# Altium PCB nimother.PcbDoc
Units mil, origin at the board's own origin, x right, y up, seen from the top; angles counter-clockwise.
Board outline 5298 x 3149 mil, 3 copper layers (Top Layer, Mid-Layer 24, Bottom Layer); 106 components, 79 nets, 394 pads, 0 vias.
Unrouted connection lines stored in the file: 128.
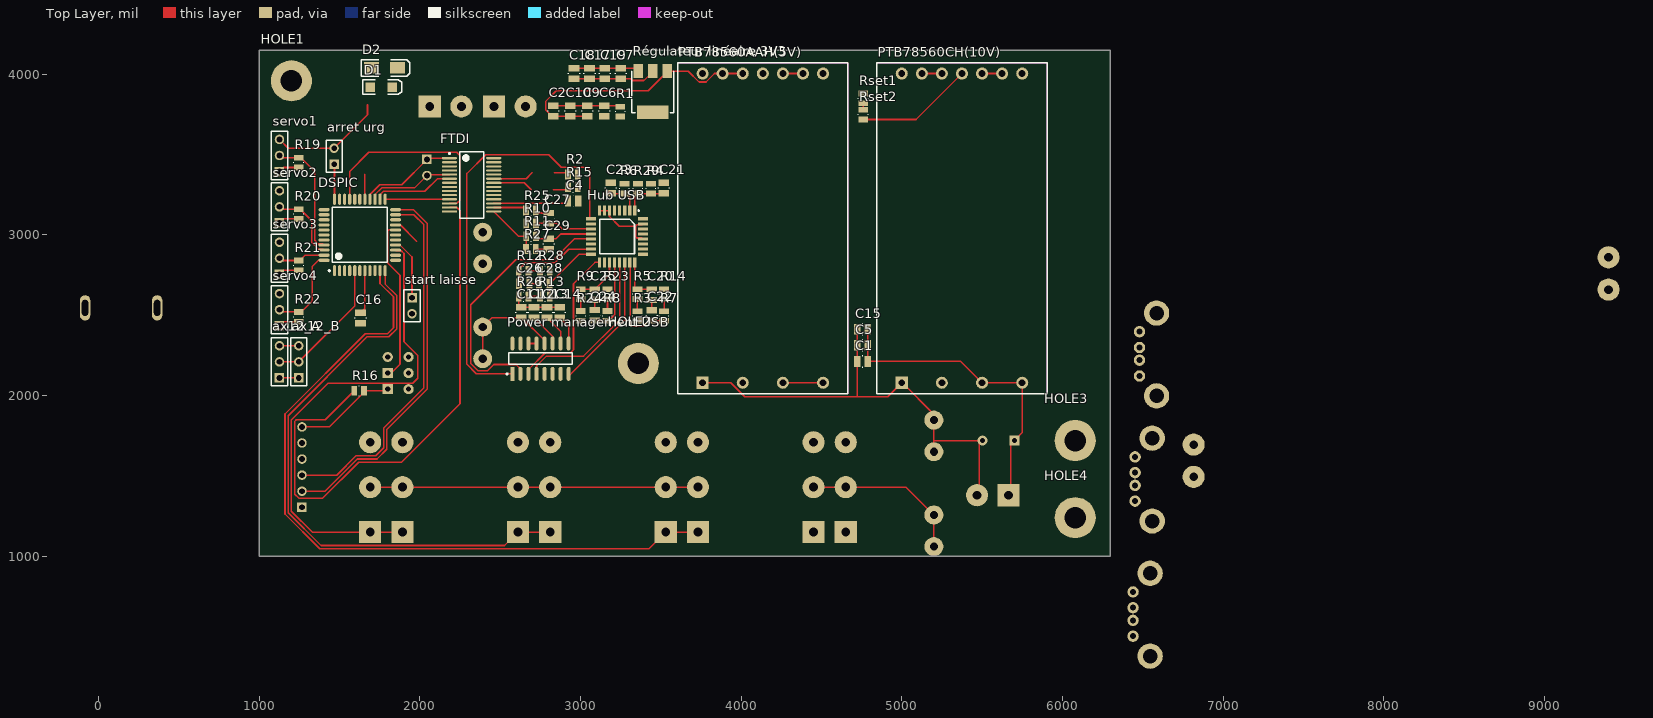
[diagram p0: Top Layer view]
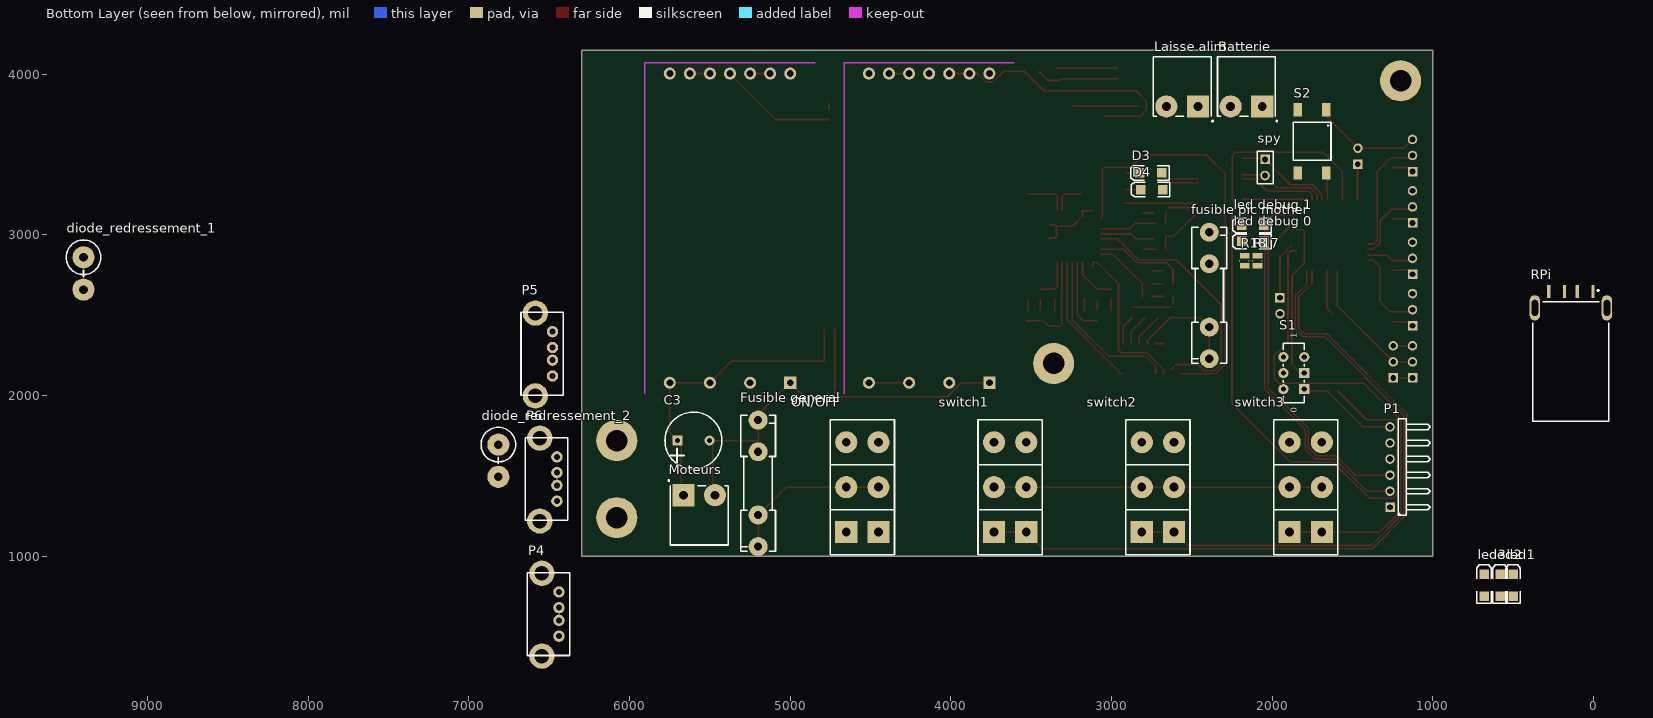
[diagram p1: Bottom Layer view, seen from below]
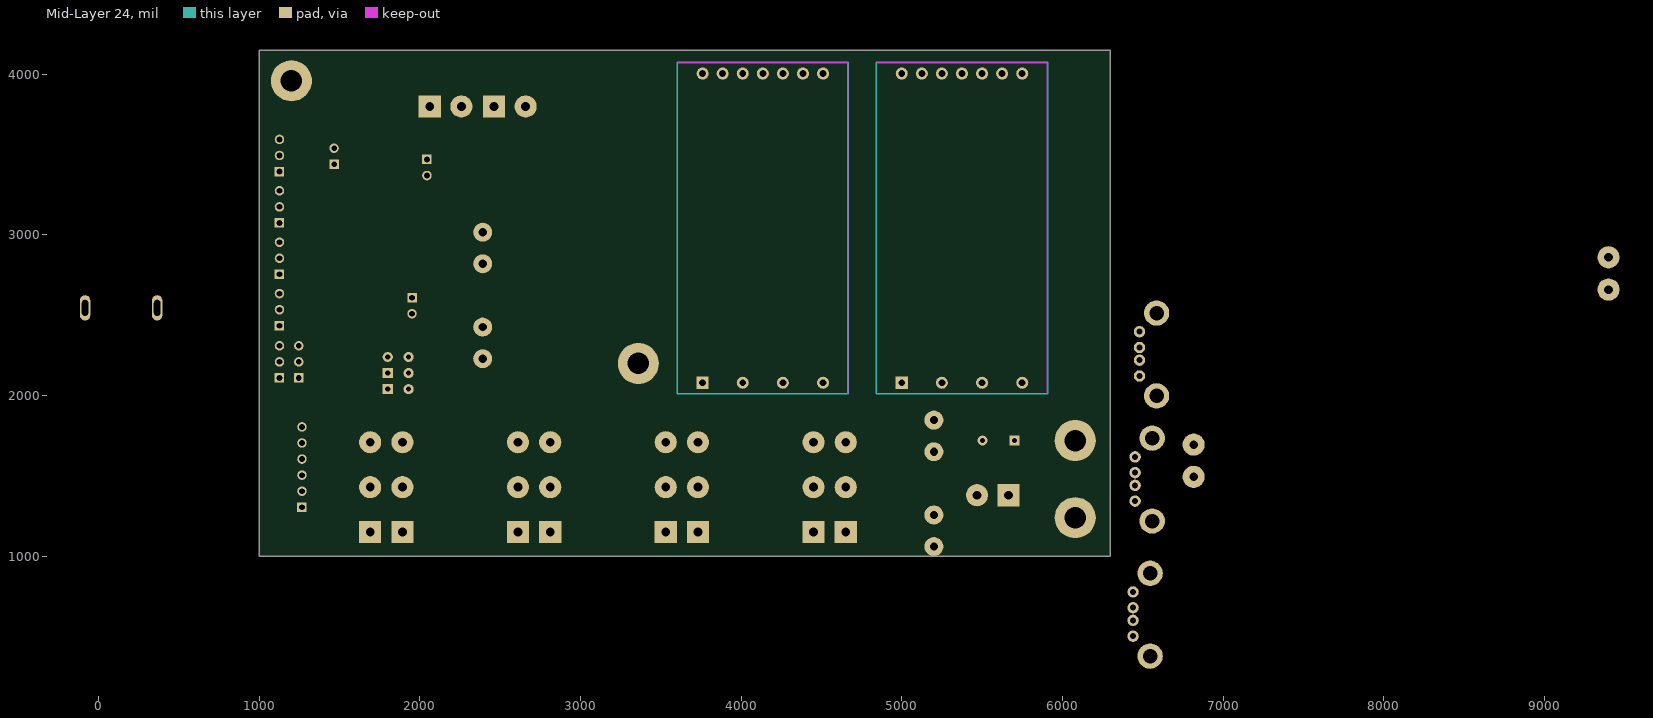
[diagram p2: Mid-Layer 24]

## Layer stack, top to bottom
Top Layer: signal copper 1.4
Dielectric: dielectric 12.6, FR-4, Dk 4.8
Mid-Layer 24: signal copper 1.4
Dielectric: dielectric 12.6, FR-4, Dk 4.8
Bottom Layer: signal copper 1.4

## Board outline
1000,1000 1000,4149 6298,4149 6298,1000

## Design rules (kind name [scope] priority, off if disabled: settings)
Clearance [All] p1: gap=10
PolygonConnect [All] p1: connectstyle=Relief reliefconductorwidth=10 reliefentries=4 polygonreliefangle="90 Angle"
RoutingVias [All] p1: holewidth=28 width=50 viastyle="Through Hole" minholewidth=28 minwidth=50 maxholewidth=28 maxwidth=50
SilkscreenOverComponentPads [All] p1: minsilkscreentomaskgap=10
SolderMaskExpansion [All] p1: expansion=4
Width [All] p1: maxlimit=10 minlimit=10 preferedwidth=10
27 further rules are at their usual default settings.

## Classes and differential pairs
component class U_mother1-pic: "arret urg" ax12_A ax12_B C4 C11 C16 C17 C18 C19 D2 D3 D4 DSPIC FTDI "fusible pic mother" led1 led2 led3 "led debug 0" "led debug 1" P1 R2 R15 R16 R17 R18 R19 R20 R21 R22 S2 servo1 servo2 servo3 servo4 spy "start laisse" switch1 switch2 switch3
component class mother1: Batterie C1 C2 C3 C5 C6 C7 C9 C10 C12 C13 C14 C15 C20 C21 C22 C23 C24 C25 C26 C27 C28 C29 D1 diode_redressement_1 diode_redressement_2 "Fusible general" HOLE1 HOLE2 HOLE3 HOLE4 "Hub USB" "Laisse alim" Moteurs ON/OFF P4 P5 P6 "Power management USB" PTB78560AAH(5V) PTB78560CH(10V) R1 R3 R4 R5 R6 R7 R8 R9 R10 R11 R12 R13 R14 R23 R24 R25 R26 R27 R28 R29 RPi Rset1 Rset2 "Régulateur linéaire 3V3" S1

## Components (designator, comment, footprint, x,y, rotation, side; value= is the part's Value field where it differs from the comment)
"arret urg" "Header 2" HDR1X2 1466,3440 r90 top
ax12_A "Header 3" HDR1X3 1126,2110 r90 top
ax12_B "Header 3" HDR1X3 1246,2110 r90 top
Batterie "Bornier" "Bornier male coude 2 voies" 2160,3800 r0 bottom
C1 "CAP" C0805C 4788,2213 r180 top
C2 "CAP" C0805C 2831,3740 r90 top
C3 "CAP POL" RB.2/.4 5702.75,1720 r0 bottom
C4 "CAP" C0805C 2922,3212 r0 top
C5 "CAP" C0805C 4788,2313 r180 top
C6 "CAP" C0805C 3147.07,3740 r90 top
C7 "CAP" C0805C 3251,3973 r90 top
C9 "CAP" C0805C 3041.71,3740 r90 top
C10 "CAP" C0805C 2936.36,3740 r90 top
C11 "CAP" C0805C 2631,2550 r270 top
C12 "CAP" C0805C 2711,2550 r270 top
C13 "CAP" C0805C 2791,2550 r270 top
C14 "CAP" C0805C 2871,2550 r270 top
C15 "CAP" C0805C 4788,2413 r180 top
C16 "CAP" C0805C 1631,2450 r90 top
C17 "CAP" C0805C 3056,3973 r90 top
C18 "CAP" C0805C 2960,3973 r90 top
C19 "CAP" C0805C 3151,3973 r90 top
C20 "CAP" C0805C 3443,2660.03 r270 top
C21 "CAP" C0805C 3518,3259.87 r90 top
C22 "CAP" C0805C 3443,2467.04 r90 top
C23 "CAP" C0805C 3188,3259.87 r90 top
C24 "CAP" C0805C 3089.43,2533.02 r270 top
C25 "CAP" C0805C 3089.43,2596.09 r90 top
C26 "CAP" C0805C 2682,2697 r180 top
C27 "CAP" C0805C 2802,3072 r90 top
C28 "CAP" C0805C 2742,2697 r0 top
C29 "CAP" C0805C 2802,2912 r90 top
D1 "LED2" LED1206G 1760,3920 r0 top
D2 "5.6V" DSO-C2/X1.8 1780,4040 r0 top
D3 "LED" LED1206Y 2755.19,3387 r0 bottom
D4 "LED" LED1206Y 2750.19,3282 r0 bottom
diode_redressement_1 "Diode" "Axial1.3 Vert" 9400,2860.98 r270 bottom
diode_redressement_2 "Diode" "Axial1.3 Vert" 6817,1694.98 r270 bottom
DSPIC "DSPIC33FJ64MC804-I/PT" TQFP-PT44_N 1626,3000 r90 top
FTDI "FT232RL" SSOP-28_M 2322,3312 r0 top
"Fusible general" "Fuse" "Fuse Holder 5x20mm" 5200,1847.4 r270 bottom
"fusible pic mother" "Fuse" "Fuse Holder 5x20mm" 2391,3017.4 r270 bottom
HOLE1 "Hole" SCREW 1200,3960 r0 top
HOLE2 "Hole" SCREW 3360,2200 r0 top
HOLE3 "Hole" SCREW 6080,1720 r90 top
HOLE4 "Hole" SCREW 6080,1240 r90 top
"Hub USB" "TUSB2046BVF" TUSB2046BVF 3338,3152 r270 top
"Laisse alim" "Bornier" "Bornier male coude 2 voies" 2560,3800 r0 bottom
led1 "LED" LED1206G 500,820 r90 bottom
led2 "LED" LED1206G 580,820 r90 bottom
led3 "LED" LED1206G 680,820 r90 bottom
"led debug 0" "LED" LED1206R 2120,2960 r0 bottom
"led debug 1" "LED" LED1206R 2120,3060 r0 bottom
Moteurs "Bornier" "Bornier male coude 2 voies" 5567.01,1380 r180 bottom
ON/OFF "Switch slide 2 pos" "Switch sur cosses 5.08mm" 4551,1430 r180 bottom
P1 "PICkit" HDR1X6H 1266,1305 r90 bottom
P4 "USB" "USB SM female vertical" 6440,640 r270 bottom
P5 "USB" "USB SM female vertical" 6480,2260 r270 bottom
P6 "USB" "USB SM female vertical" 6453,1480.87 r270 bottom
"Power management USB" "TPS2044" TPS2044 2751,2230 r90 top
PTB78560AAH(5V) "PTB78560x" PTB78560x 3760,2080 r90 top
PTB78560CH(10V) "PTB78560x" PTB78560x 5000,2080 r90 top
R1 "RES" C0805R 3248,3799.06 r270 top
R2 "RES" C0805R 2922,3377 r0 top
R3 "RES" C0805R 3354.43,2465.07 r90 top
R4 "RES" C0805R 3438,3257.91 r90 top
R5 "RES" C0805R 3354.43,2662 r270 top
R6 "RES" C0805R 3273,3318.93 r270 top
R7 "RES" C0805R 3520.43,2465.07 r90 top
R8 "RES" C0805R 3168,2466.09 r90 top
R9 "RES" C0805R 3002,2663.02 r270 top
R10 "RES" C0805R 2662,3072 r0 top
R11 "RES" C0805R 2662,2992 r0 top
R12 "RES" C0805R 2676.09,2777 r180 top
R13 "RES" C0805R 2747.91,2617 r0 top
R14 "RES" C0805R 3520.43,2662 r270 top
R15 "RES" C0805R 2922,3297 r0 top
R16 "RES" C0805R 1591,2030 r0 top
R17 "RES" C0805R 2091,2808.98 r90 bottom
R18 "RES" C0805R 2171,2808.98 r90 bottom
R19 "RES" C0805R 1246,3420 r90 top
R20 "RES" C0805R 1246,3100 r90 top
R21 "RES" C0805R 1246,2780 r90 top
R22 "RES" C0805R 1246,2460 r90 top
R23 "RES" C0805R 3168,2602 r90 top
R24 "RES" C0805R 3002,2527.12 r270 top
R25 "RES" C0805R 2722,3152 r180 top
R26 "RES" C0805R 2615.07,2617 r0 top
R27 "RES" C0805R 2722,2912 r180 top
R28 "RES" C0805R 2808.93,2777 r180 top
R29 "RES" C0805R 3358,3318.93 r270 top
RPi "USB" "USB SM2.5 Male" 140,2440 r270 bottom
Rset1 "RES" C0805R 4760,3820 r90 top
Rset2 "RES" C0805R 4760,3780 r270 top
"Régulateur linéaire 3V3" "LM2937IMP-3.3" SOT223 3540,4020 r180 top
S1 "SW-DPDT/Reset" MCLSS22 1800,2140 r90 bottom
S2 "SPST-NO" SPST-NO 1662.83,3780 r0 bottom
servo1 "Header 3" HDR1X3 1126,3395 r90 top
servo2 "Header 3" HDR1X3 1126,3075 r90 top
servo3 "Header 3" HDR1X3 1126,2755 r90 top
servo4 "Header 3" HDR1X3 1126,2435 r90 top
spy "Header 2" HDR1X2 2044,3470 r270 bottom
"start laisse" "Header 2" HDR1X2 1951,2610 r270 top
switch1 "Switch slide 2 pos" "Switch sur cosses 5.08mm" 3631,1430 r180 bottom
switch2 "Switch slide 2 pos" "Switch sur cosses 5.08mm" 2711,1430 r180 bottom
switch3 "Switch slide 2 pos" "Switch sur cosses 5.08mm" 1791,1430 r180 bottom

## Footprints (in the part's own frame and the unit in brackets; to place one, negate y for a bottom-side part, rotate by r counter-clockwise, add the part's x,y. Pads: shape width x height; smd on the part's side, far side on the other; paste and mask are expansions set on the pad)
"Axial1.3 Vert" [mm] "Vertical Axial Lead ; Diode : DO-201AD ; 5mm radius, 1.25mm leads"
  round 3.5 hole 1.35: 1(0,0) 2(5.1,0)
  silkscreen extent -2.74,-2.74 3.05,2.74, body extent -2.8,-2.8 5.74,2.8, height 15.69
"Bornier male coude 2 voies" [mm] "Bornier male coude 2 voies 12A. Pas 5mm (model : CTB9350/2A) -- 3D FAUSSE"
  rect 3.5x3.5 hole 1.4: 1(-2.5,0)
  round 3.5 hole 1.4: 2(2.5,0)
  silkscreen extent -4.9,-7.87 4.57,2.41, body extent -4.2,-7.93 4.2,1.27, height 7.25
C0805C [mm]
  rect 1x1.7 smd: 1(0,0) 2(1.65,0)
  silkscreen extent 0.8,-0.89 0.85,0.89, body extent -0.21,-0.61 1.79,0.64, height 0.78
C0805R [mm]
  rect 0.9x1.55 smd: 1(0,0) 2(1.55,0)
  silkscreen extent 0.73,-0.76 0.81,0.76, body extent -0.24,-0.62 1.76,0.63, height 0.78
DSO-C2/X1.8 [mm] "Diode; DO-214-AC/SMA; 2 C-Bend Leads; Body 5 x 2.7 mm, inc. leads (LxW)"
  rect 2.4x1.8 smd: A(2.05,0) K(-2.05,0)
  silkscreen extent -3.65,-1.3 3.95,1.3, body extent -2.74,-1.4 2.74,1.4, height 2.28
"Fuse Holder 5x20mm" [mm] "Schurter Fuse Holder 0751.0110"
  round 3 hole 1.3: 1(0,0) 1(5,0) 2(15,0) 2(20,0)
  silkscreen extent -0.75,-2.75 20.75,2.75, body extent -0.51,-3.1 20.58,3.1, height 9.86
HDR1X2 [mm] "Connector; Header; 2 Position"
  rect 1.5x1.5 hole 0.9: 1(0,0)
  round 1.5 hole 0.9: 2(2.54,0)
  silkscreen extent -1.27,-1.27 3.81,1.27
HDR1X3 [mm] "Connector; Header; 3 Position"
  rect 1.5x1.5 hole 0.9: 1(0,0)
  round 1.5 hole 0.9: 2(2.54,0) 3(5.08,0)
  silkscreen extent -1.27,-1.27 6.35,1.27
HDR1X6H [mm] "Connector; Header; 6 Position; Right Angle"
  rect 1.5x1.5 hole 0.9: 1(0,0)
  round 1.5 hole 0.9: 2(2.54,0) 3(5.08,0) 4(7.62,0) 5(10.16,0) 6(12.7,0)
  silkscreen extent -1.27,-6.35 13.97,-1.27, body extent -1.17,-5.85 13.87,1.25, height 5.42
LED1206G [mm] "SMT LED; 2 Flat Leads; 3.2X1.6X1.1"
  rect 1.5x1.5 smd: 1(-1.75,0) 2(1.75,0)
  silkscreen extent -2.9,-1.15 3.2,1.15, body extent -1.6,-0.8 1.6,0.8, height 1.11
LED1206R [mm] "SMT LED; 2 Flat Leads; 3.2X1.6X1.1"
  rect 1.5x1.5 smd: 1(-1.75,0) 2(1.75,0)
  silkscreen extent -2.9,-1.15 3.2,1.15, body extent -1.6,-0.8 1.6,0.8, height 1.11
LED1206Y [mm] "SMT LED; 2 Flat Leads; 3.2X1.6X1.1"
  rect 1.5x1.5 smd: 1(-1.75,0) 2(1.75,0)
  silkscreen extent -2.9,-1.15 3.2,1.15, body extent -1.6,-0.8 1.6,0.8, height 1.11
MCLSS22 [mm] "Slide Switch DPDT"
  rect 1.6x1.6 hole 0.8: 1(0,0) 2(-2.54,0)
  round 1.6 hole 0.8: 3(2.54,0) 4(0,3.3) 5(-2.54,3.3) 6(2.54,3.3)
  silkscreen extent -4.7,0 4.7,3.3, body extent -4.7,-2 4.7,3.3, height 3.5
PTB78560x [mm] "PTB78560x Texas Instruments Regulator"
  rect 1.905x1.905 hole 1.1: 1(0,0)
  round 1.905 hole 1.1: 2(0,-6.35) 3(0,-12.7) 4(0,-19.05) 5(48.895,-19.05) 6(48.895,-15.875) 7(48.895,-12.7) 8(48.895,-9.525) 9(48.895,-6.35) 10(48.895,-3.175) 11(48.895,0)
  Mid-Layer 24 lines w0.2: -1.778,4 50.673,4.001 50.673,-23.05 -1.778,-23.05 -1.778,4
  Keep-Out Layer lines w0.2: 50.609,3.937 50.609,-22.987 -1.714,-22.987
  silkscreen extent -1.71,-22.99 50.61,3.94, body extent -1.71,-22.99 50.61,3.94, height 10
RB.2/.4 [mil]
  rect 62x62 hole 31.5: 1(0,0)
  round 62 hole 31.5: 2(-200,0)
  silkscreen extent -277,-177 77,177, body extent -298,-194 95,200, height 650
SCREW [mm] "Mounting Hole M3"
  round 6.5 hole 3.4: 1(0,0)
  body extent -2.89,-2.52 2.89,2.52, height 10
SOT223 [mm]
  rect 1.5x2.2 smd: 1(0,0) 2(2.3,0) 3(4.6,0)
  rect 5x2.2 smd: ""(2.3,6.5)
  silkscreen extent -1,0 5.6,6.6, body extent -0.95,-0.2 5.55,6.8, height 1.64
SPST-NO [mm] "Tactile Switch SPST-NO 6x6mm"
  rect 1.4x2.1 smd: 1(0,0) 2(4.5,0) 3(4.5,10) 4(0,10)
  silkscreen extent -0.75,2 5.25,8, body extent -0.75,0.93 5.25,9.08, height 5
SSOP-28_M [mm] "SOP, 28-Leads, Body 10.2x5.3mm, Pitch 0.65mm, IPC Low Density"
  oval 2.4x0.35 smd: 1(-3.5,4.225) 2(-3.5,3.575) 3(-3.5,2.925) 4(-3.5,2.275) 5(-3.5,1.625) 6(-3.5,0.975) 7(-3.5,0.325) 8(-3.5,-0.325) 9(-3.5,-0.975) 10(-3.5,-1.625) 11(-3.5,-2.275) 12(-3.5,-2.925) 13(-3.5,-3.575) 14(-3.5,-4.225) 15(3.5,-4.225) 16(3.5,-3.575) 17(3.5,-2.925) 18(3.5,-2.275) 19(3.5,-1.625) 20(3.5,-0.975) 21(3.5,-0.325) 22(3.5,0.325) 23(3.5,0.975) 24(3.5,1.625) 25(3.5,2.275) 26(3.5,2.925) 27(3.5,3.575) 28(3.5,4.225)
  silkscreen extent -3.62,-5.25 1.9,5.25, body extent -3.91,-5.1 3.91,5.1, height 1.98
"Switch sur cosses 5.08mm" [mm] "Crimp Faston CI 5.08mm model : AMP - 1217080-1"
  rect 3.5x3.5 hole 1.4: 1(-2.55,-7.1) 1(2.55,-7.1)
  round 3.5 hole 1.4: 2(-2.55,7.1) 2(2.55,7.1) 3(-2.55,0) 3(2.55,0)
  silkscreen extent -5.08,-10.67 5.08,10.67, body extent -11.5,-11 11.5,12, height 29.34
TPS2044 [mm] "Power distribution USB"
  rect 2.2x0.6 smd: 1(-2.4,4.445)
  oval 2.2x0.6 smd: 2(-2.4,3.175) 3(-2.4,1.905) 4(-2.4,0.635) 5(-2.4,-0.635) 6(-2.4,-1.905) 7(-2.4,-3.175) 8(-2.4,-4.445) 9(2.4,-4.445) 10(2.4,-3.175) 11(2.4,-1.905) 12(2.4,-0.635) 13(2.4,0.635) 14(2.4,1.905) 15(2.4,3.175) 16(2.4,4.445)
  silkscreen extent -2.52,-5 0.9,5.42, body extent -3,-5.1 3,5.1, height 1.7
TQFP-PT44_N [mm] "Thin QFP, 44-Leads, Body 10x10mm, Pitch 0.8mm, IPC Medium Density"
  oval 1.75x0.5 smd: 1(-5.65,4) 2(-5.65,3.2) 3(-5.65,2.4) 4(-5.65,1.6) 5(-5.65,0.8) 6(-5.65,0) 7(-5.65,-0.8) 8(-5.65,-1.6) 9(-5.65,-2.4) 10(-5.65,-3.2) 11(-5.65,-4) 23(5.65,-4) 24(5.65,-3.2) 25(5.65,-2.4) 26(5.65,-1.6) 27(5.65,-0.8) 28(5.65,0) 29(5.65,0.8) 30(5.65,1.6) 31(5.65,2.4) 32(5.65,3.2) 33(5.65,4)
  oval 0.5x1.75 smd: 12(-4,-5.65) 13(-3.2,-5.65) 14(-2.4,-5.65) 15(-1.6,-5.65) 16(-0.8,-5.65) 17(0,-5.65) 18(0.8,-5.65) 19(1.6,-5.65) 20(2.4,-5.65) 21(3.2,-5.65) 22(4,-5.65) 34(4,5.65) 35(3.2,5.65) 36(2.4,5.65) 37(1.6,5.65) 38(0.8,5.65) 39(0,5.65) 40(-0.8,5.65) 41(-1.6,5.65) 42(-2.4,5.65) 43(-3.2,5.65) 44(-4,5.65)
  silkscreen extent -5.77,-4.35 4.35,4.95, body extent -6,-6 6,6, height 1.05
TUSB2046BVF [mil] "TI 4-Port USB Hub"
  rect 63x19.7 smd: 1(0,0) 2(0,-31.5) 3(0,-63) 4(0,-94.5) 5(0,-125.9) 6(0,-157.4) 7(0,-188.9) 8(0,-220.4) 17(322.8,-220.4) 18(322.8,-188.9) 19(322.8,-157.4) 20(322.8,-125.9) 21(322.8,-94.5) 22(322.8,-63) 23(322.8,-31.5) 24(322.8,0)
  rect 19.7x63 smd: 9(51.2,-271.6) 10(82.7,-271.6) 11(114.2,-271.6) 12(145.7,-271.6) 13(177.1,-271.6) 14(208.6,-271.6) 15(240.1,-271.6) 16(271.6,-271.6) 25(271.6,51.2) 26(240.1,51.2) 27(208.6,51.2) 28(177.1,51.2) 29(145.7,51.2) 30(114.2,51.2) 31(82.7,51.2) 32(51.2,51.2)
  silkscreen extent -4,-218 270,28, body extent -16,-287 339,67, height 59
"USB SM2.5 Male" [mm] "USB/SM2.5-4H4; Male USB Connector; USB1.1, Type A, SM; 4 Position; Right Angle"
  rect 2.1x0.5 smd: 1(-5.3,3.5) 2(-5.3,1) 3(-5.3,-1) 4(-5.3,-3.5)
  oval 4x1.65 hole 1 slot 2.5 at 0 deg: 5(-2.7,-5.7) 6(-2.7,5.7)
  round 0.8 hole 1.1 unplated: MH1(-2.7,-2.25) MH2(-2.7,2.25)
  silkscreen extent -5.58,-6 15.2,6, body extent -3.5,-6 14.83,6, height 4.5
"USB SM female vertical" [mm] "USB SM female vertical"
  round 1.8 hole 0.95: 1(-3.5,0) 2(-1,0) 3(1,0) 4(3.5,0)
  round 4 hole 2.3: 5(6.65,-2.7) 6(-6.45,-2.7)
  silkscreen extent -6.55,-4.99 6.55,1.7, body extent -7.99,-4.99 7.99,2.65, height 13.75

## Part data
"arret urg" spy "start laisse": "Header, 2-Pin"
ax12_A ax12_B servo1 servo2 servo3 servo4: "Header, 3-Pin"
Batterie "Laisse alim" Moteurs: library part "Header 2", "Header, 2-Pin"
C1 C2 C4 C5 C6 C7 C9 C10 C11 C12 C13 C14 C15 C16 C17 C18 C19 C20 C21 C22 C23 C24 C25 C26 C27 C28 C29: "Capacitor"
C3: "Polarized Capacitor"
D1 led1 led2 led3: "Typical RED, GREEN, YELLOW, AMBER GaAs LED"
D2: library part ZENER, "Zener Diode"
D3 D4 "led debug 0" "led debug 1": library part LED2, "Typical RED, GREEN, YELLOW, AMBER GaAs LED"
diode_redressement_1 diode_redressement_2: "Default Diode"
DSPIC: "High-Performance 16-bit Digital Signal Controller, 64 KB Flash, 16 KB RAM, 44-Pin TQFP, Industrial Temperature"
FTDI: "USB UART Asynchronous Serial Data Transfer Chip, SSOP-28, Tube"
"Fusible general" "fusible pic mother": library part FUSE
HOLE1 HOLE2 HOLE3 HOLE4: "Mounting Hole for screws"
"Hub USB": "TI 4-Port USB Hub"
ON/OFF switch1 switch2 switch3: library part "Switch slide On/Off", "Switch slide 2 positions"
P1: library part "Header ICSP", "Header, 6-Pin, Right Angle"
P4 P5 P6 RPi: library part "USB Con", "USB Connector"
"Power management USB": "Power distribution USB"
PTB78560AAH(5V) PTB78560CH(10V): "Texas Instruments Regulators"
R1 R2 R3 R4 R5 R6 R7 R8 R9 R10 R11 R12 R13 R14 R15 R16 R17 R18 R19 R20 R21 R22 R23 R24 R25 R26 R27 R28 R29 Rset1 Rset2: "Resistor"
"Régulateur linéaire 3V3": "500 mA Low Dropout Regulator"
S1: library part SW-DPDT, "Double-Pole, Double-Throw Switch, ref MCLSS22"
S2: "Tactile Switch 7.3mm, SMD"

## Nets (pads, with @x,y where several pads share a name; then routed paths per layer and width w, separated by ;. In a path a pad name is that pad's centre, name@x,y a point inside that pad or via, vN(x,y) a via of type N, cw(c..) or ccw(c..) an arc to the next point about the centre after c; other vN are vias at no path point)
+3V3: "Hub USB.3" "Hub USB.4" "Hub USB.25" "Hub USB.26" "Régulateur linéaire 3V3.3" C7.2 C17.2 C18.2 C19.2 D1.1 DSPIC.17 DSPIC.28 DSPIC.40 FTDI.4 P1.2 R2.2 R4.2 R15.2 | length 380.9
  Top Layer w10: C18.2 C17.2 C19.2 C7.2 3340.94,4037.96
+5V0: "fusible pic mother.2" "Power management USB.15" "Power management USB.16" "Régulateur linéaire 3V3.1" C2.1 C9.1 C10.1 FTDI.20 PTB78560AAH(5V).9 PTB78560AAH(5V).10 R19.1 R20.1 R21.1 R22.1 servo1.1 servo2.1 servo3.1 servo4.1 | length 2064.7
  Top Layer w10: servo4.1@1151,2460 R22.1 ; servo3.1@1151,2780 R21.1 ; servo2.1@1151,3100 R20.1 ; servo1.1@1151,3420 R19.1 ; C9.1 C10.1 C2.1 2821.6,3740 2782.54,3779.06 2782.54,3830.86 2849.68,3898 3421.5,3898 3540,4016.5 3540,4020 3670.75,4020 3738.25,3952.5 3781.75,3952.5 3834.25,4005 3885,4005 4010,4005
+10V0: ax12_A.1 ax12_B.1 C6.1 PTB78560CH(10V).9 PTB78560CH(10V).10 | length 245
  Top Layer w10: ax12_A.1 ax12_B.1 ; 5125,4005 5250,4005
+30V: "Fusible general.2" C1.2 C3.1 C5.2 C15.2 Moteurs.1 PTB78560AAH(5V).1 PTB78560CH(10V).1 | length 2860.2
  Top Layer w10: 3760,2080 3935.75,2080 4022.19,1993.56 4913.56,1993.56 5000,2080 5004,2080 5200,1884 5200,1847.4 5200,1650.55 ; 4723.04,1997.6 C1.2 C5.2 C15.2 ; 5203,1720 5500,1720 ; 5481.57,1380 5481.57,1701.57
"ARRET URG": "arret urg.1" DSPIC.33 | length 215
  Top Layer w10: DSPIC.33 1468.52,3437.48
CLK12: DSPIC.30 FTDI.12 | length 1266.8
  Top Layer w10: DSPIC.30 1563.01,3395.58 1682.42,3515 2229,3515 2247,3497 2247,3213.92 2230.08,3197 FTDI.12@2184.36,3197
D+: FTDI.15 R11.1 R27.2 | length 344.8
  Top Layer w10: FTDI.15 2613.46,2992 R11.1 R27.2@2662,2913.02
D-: FTDI.16 R10.1 R25.2 | length 260.9
  Top Layer w10: FTDI.16 2641.72,3171.25 ; R10.1 R25.2@2662,3150.98
"DATA AX12": ax12_A.2 ax12_B.2 DSPIC.5 | length 831.9
  Top Layer w10: ax12_A.2 ax12_B.2 1594.5,2558.5 DSPIC.5
"DATA SERVO1": DSPIC.41 R19.2 servo1.2 | length 740
  Top Layer w10: servo1.2@1139.98,3481.02 R19.2 1259.98,3481.02 1346,3395 1346,2966.32 1368.66,2943.66 1396.91,2943.66 DSPIC.41
"DATA SERVO2": DSPIC.42 R20.2 servo2.2 | length 448.3
  Top Layer w10: servo2.2@1139.98,3161.02 R20.2 1254.42,3161.02 1326,3089.44 1326,2954.83 1368.66,2912.17 1396.91,2912.17 DSPIC.42
"DATA SERVO3": DSPIC.43 R21.2 servo3.2 | length 277.2
  Top Layer w10: servo3.2@1139.98,2841.02 1252.02,2841.02 1285.02,2874.02 DSPIC.43
"DATA SERVO4": DSPIC.44 R22.2 servo4.2 | length 522.7
  Top Layer w10: servo4.2@1139.98,2521.02 1262.02,2521.02 1331,2590 1331,2805 1368.52,2842.52 DSPIC.44
DM0: R6.1 RPi.2
DM2: P4.2 R12.1 R28.2 | length 71.8
  Top Layer w10: R12.1 R28.2
DM3: P5.2 R9.2 R24.1 | length 74.9
  Top Layer w10: R24.1 R9.2
DM4: P6.2 R7.2 R14.2 | length 74.9
  Top Layer w10: R7.2 R14.2
DP0: R29.1 RPi.3
DP2: P4.3 R13.1 R26.2 | length 71.8
  Top Layer w10: R26.2 R13.1
DP3: P5.3 R8.2 R23.1 | length 74.9
  Top Layer w10: R8.2 R23.1
DP4: P6.3 R3.2 R5.2 | length 74.9
  Top Layer w10: R3.2 R5.2
FLUSH: DSPIC.24 FTDI.6 | length 501.8
  Top Layer w10: DSPIC.24 1751.98,3250.68 1773.3,3272 2031,3272 2109.39,3350.39 FTDI.6
GND: "arret urg.2" "Hub USB.6" "Hub USB.7" "Hub USB.8" "Hub USB.28" "Hub USB.31" "Laisse alim.1" "Power management USB.13" "Power management USB.14" "Régulateur linéaire 3V3.2" "start laisse.2" ax12_A.3 ax12_B.3 Batterie.1 C1.1 C2.2 C3.2 C4.2 C5.1 C6.2 C7.1 C9.2 C10.2 C11.1 C12.1 C13.1 C14.1 C15.1 C16.1 C17.1 C18.1 C19.1 C20.2 C21.2 C22.2 C23.2 C24.1 C25.1 C26.1 C27.2 C28.1 C29.1 DSPIC.6 DSPIC.16 DSPIC.29 DSPIC.39 FTDI.7 FTDI.18 FTDI.21 FTDI.25 FTDI.26 led1.2 led2.2 led3.2 Moteurs.2 P1.3 P4.4 P5.4 P6.4 PTB78560AAH(5V).3 PTB78560AAH(5V).4 PTB78560AAH(5V).6 PTB78560AAH(5V).7 PTB78560CH(10V).3 PTB78560CH(10V).4 PTB78560CH(10V).6 PTB78560CH(10V).7 R1.1 R3.1 R14.1 R17.2 R18.2 R23.2 R24.2 R25.1 R26.1 R27.1 R28.1 RPi.4 Rset1.1 Rset2.1 S2.2 servo1.3 servo2.3 servo3.3 servo4.3 switch1.3 switch2.3 switch3.3 | length 7414.2
  Top Layer w10: ax12_A.3 ax12_B.3 ; servo1.3 1181,3540 1466,3540 1673.83,3747.83 1673.83,3810 ; switch3.3@1690.61,1430 1891.39,1430 2610.61,1430 2811.39,1430 3530.61,1430 switch1.3@3731.39,1430 ; C11.1@2615.07,2565.93 R26.1 ; C11.1 C12.1 C13.1 C14.1 ; 2676,2324.49 2726,2324.49 ; C26.1 C28.1 ; R27.1 C29.1 ; R25.1@2737.04,3136.96 C27.2 ; C2.2 C10.2 C9.2 C6.2 R1.1@3242.09,3804.96 ; C18.1 C17.1 C19.1 C7.1 3311.85,3973 3323.16,3961.69 3394.64,3961.69 3449.45,4016.5 ; C24.1 C25.1 ; 3117.6,3152 3149.1,3152 3180.6,3152 3180.6,3114.4 3241.14,3053.86 3342.7,3053.86 ; 3382.55,3062.65 3351.49,3062.65 3342.7,3053.86 ; 3389.2,2974.9 3382.65,2981.45 3351.49,2981.45 3342.7,2990.24 3342.7,3053.86 ; C22.2 C20.2 ; 4260,2080 4510,2080 ; 4260,4005 4385,4005 ; Rset2.1 Rset1.1 ; C15.1 C5.1 C1.1 5367,2213 5500,2080 5750,2080 5750,1770 5678.43,1698.43 5678.43,1380 ; 5500,4005 5625,4005
GPIO: FTDI.13 R16.1 | length 3506.2
  Top Layer w10: R16.1 1410.53,1849.53 1230.26,1849.53 1220,1839.27 1220,1418 1221.47,1416.53 1221.47,1386.56 1247.56,1360.47 1393.72,1360.47 1618.88,1585.63 1886.15,1585.63 2250,1949.48 2250,2212 2250,3151.18 FTDI.13@2229.18,3172 ; FTDI.13@2229.18,3172 2184.95,3172 FTDI.13@2229.18,3172
LED1: DSPIC.1 led1.1
LED2: DSPIC.8 led2.1
LED3: DSPIC.9 led3.1
MCLR: P1.1 R16.2 S1.3 | length 643.1
  Top Layer w10: 1266,1805 1435.44,1805 1652.02,2021.58 R16.2 1811,2030
NetBatterie_2: Batterie.2 diode_redressement_1.1
NetC4_1: C4.1 FTDI.17 | length 458
  Top Layer w10: FTDI.17 2460.46,3197.51 C4.1@2917.51,3197.51
NetC16_2: C16.2 DSPIC.7 | length 273.6
  Top Layer w10: C16.2 1657.5,2541.46 DSPIC.7
NetC20_1: "Hub USB.24" C20.1 R5.1 | length 263.4
  Top Layer w10: 3338,2829.2 3338,2678.43 R5.1 3441.03,2662 C20.1
NetC21_1: "Hub USB.1" C21.1 R4.1 R29.2 | length 280.3
  Top Layer w10: 3338,3152 3338,3247 3348.91,3257.91 R4.1 3516.03,3257.91 C21.1
NetC22_1: "Hub USB.23" C22.1 R7.1 | length 609.4
  Top Layer w10: 3306.5,2829.2 3308.91,2826.79 3308.91,2441.14 3317.7,2432.35 3391.15,2432.35 C22.1@3425.84,2467.04 ; C22.1@3444.97,2465.07 R7.1@3530.43,2465.07
NetC23_1: "Hub USB.2" C23.1 R6.2 | length 211.1
  Top Layer w10: C23.1@3189.97,3257.91 3287.09,3257.91 3306.5,3238.5 3306.5,3152
NetC24_2: "Hub USB.20" C24.2 R8.1 | length 463.5
  Top Layer w10: C24.2@3091.39,2466.09 R8.1 3176.42,2466.09 3213.51,2503.19 3213.51,2829.2
NetC25_2: "Hub USB.19" C25.2 R9.1 | length 291.4
  Top Layer w10: R9.1 C25.2@3087.46,2663.02 ; C25.2 3180.6,2752.23 3180.6,2829.2
NetC26_2: "Hub USB.15" C26.2 R12.2 | length 593
  Top Layer w10: C26.2 2617.04,2783.45 2615.07,2785.42 2656.14,2826.49 2840.85,2826.49 2926.26,2911.9 3066.4,2911.9
NetC27_1: "Hub USB.11" C27.1 R10.2 | length 357.5
  Top Layer w10: R10.2 C27.1 2852,3072 2886.2,3037.8 3066.4,3037.8
NetC28_2: "Hub USB.16" C28.2 R13.2 | length 413.4
  Top Layer w10: C28.2 2990.36,2880.4 3066.4,2880.4 ; R13.2 C28.2@2808.93,2695.03
NetC29_2: "Hub USB.12" C29.2 R11.2 | length 340.5
  Top Layer w10: R11.2@2738.06,2976.96 C29.2 2846.96,2976.96 2876.3,3006.3 3066.4,3006.3
NetD1_2: D1.2 R1.2
NetD3_1: D3.1 R2.1 | length 76.1
  Top Layer w10: 2835.9,3387 R2.1@2912,3387
NetD4_1: D4.1 R15.1 | length 76.1
  Top Layer w10: 2830.9,3282 R15.1@2907,3282
Netdiode_redressement_1_2: diode_redressement_1.2 diode_redressement_2.2 ON/OFF.1
Netdiode_redressement_2_1: "Laisse alim.2" diode_redressement_2.1
NetDSPIC_18: DSPIC.18 S1.1 | length 1004.8
  Top Layer w10: S1.1@1811,2130 1876,2195 1876,2750 1798.99,2827.01 1798.99,3022.99 1807.5,3031.5 DSPIC.18
NetDSPIC_19: "led debug 0.1" DSPIC.19 | length 177.2
  Top Layer w10: DSPIC.19 DSPIC.19@1877.01,3062.99 ; DSPIC.19@1880.01,3062.99 DSPIC.19@1877.01,3062.99 ; 1980,2960 DSPIC.19@1877.01,3062.99
NetDSPIC_20: "led debug 1.1" DSPIC.20
NetDSPIC_27: DSPIC.27 S2.3 | length 155.2
  Top Layer w10: DSPIC.27 1657.5,3377.64
"NetFusible general_1": "Fusible general.1" ON/OFF.3 | length 1018
  Top Layer w10: ON/OFF.3@4450.61,1430 4651.39,1430 5026.85,1430 5200,1256.85 5200,1060
"Netled debug 0_2": "led debug 0.2" R17.1
"Netled debug 1_2": "led debug 1.2" R18.1
NetPTB78560AAH(5V)_8: PTB78560AAH(5V).8 Rset1.2
NetPTB78560CH(10V)_8: PTB78560CH(10V).8 Rset2.2 | length 733.5
  Top Layer w10: Rset2.2 5088.98,3718.98 5375,4005
NetRPi_1: RPi.1 S1.2
OUT1: "fusible pic mother.1" "Power management USB.12" C11.2 | length 680
  Top Layer w10: 2391,2230 2391,2426.85 2449.19,2485.04 C11.2 ; C11.2@2634.86,2485.04 2776,2343.9 2776,2324.49
OUT2: "Power management USB.11" C12.2 P4.1 | length 208.2
  Top Layer w10: C12.2 2826,2370.04 2826,2324.49
OUT3: "Power management USB.10" C13.2 P5.1 | length 195.8
  Top Layer w10: C13.2 2876,2400.04 2876,2324.49
OUT4: "Power management USB.9" C14.2 P6.1 | length 183.3
  Top Layer w10: C14.2 2926,2430.04 2926,2324.49
OVRCUR1: "Hub USB.10" "Power management USB.5"
OVRCUR2: "Hub USB.14" "Power management USB.6"
OVRCUR3: "Hub USB.18" "Power management USB.7"
OVRCUR4: "Hub USB.22" "Power management USB.8" | length 842.2
  Top Layer w10: 2932.76,2128.76 3275,2471 3275,2829.2
PGEC: DSPIC.22 P1.5 | length 2378.2
  Top Layer w10: 1266,1405 1409.96,1405 1610.59,1605.63 1733.64,1605.63 1794.5,1666.49 1794.5,1789.54 2045,2040.04 2045,3072.31 1959.83,3157.48 DSPIC.22
PGED: DSPIC.21 P1.4 | length 2301.1
  Top Layer w10: 1266,1505 1481.68,1505 1602.31,1625.63 1725.36,1625.63 1774.5,1674.78 1774.5,1797.83 2025,2048.32 2025,3062.92 1961.94,3125.98 DSPIC.21 1849.43,3125 DSPIC.21@1875.7,3125
PWRON1: "Hub USB.9" "Power management USB.1" | length 2657.8
  Top Layer w10: 2576,2135.51 2575.57,2135.94 2351.77,2135.94 2293,2194.72 2293,3382.85 2410.37,3500.23 2802.94,3500.23 2880.65,3422.51 3042.95,3422.51 3057.65,3407.82 3057.65,3109.55 3066.4,3100.8
PWRON2: "Hub USB.13" "Power management USB.2" | length 1645.7
  Top Layer w10: 2316,2200 2316,2566 2596.49,2846.49 2832.57,2846.49 2963.08,2977 3064.3,2977 3066.4,2974.9 ; 2316.14,2200.14 2360.33,2155.94 2421.67,2155.94 2459.55,2193.82 2598.18,2193.82 2628,2164
PWRON3: "Hub USB.17" "Power management USB.3" | length 1007.3
  Top Layer w10: 2676,2135.51 2676,2162 2780.18,2266.18 2937.11,2266.18 2956.49,2285.56 2956.49,2695.74 3089.95,2829.2 3117.6,2829.2 3117.6,2806.6
PWRON4: "Hub USB.21" "Power management USB.4" | length 1042.9
  Top Layer w10: 2726,2135.51 2726,2183.72 2788.47,2246.18 3018.68,2246.18 3243.5,2471 3243.5,2829.2
RTS: DSPIC.23 FTDI.11 | length 400.7
  Top Layer w10: DSPIC.23 FTDI.11
RX: DSPIC.26 FTDI.1 spy.2 | length 606.7
  Top Layer w10: DSPIC.26 1691.39,3224.84 1691.39,3254.39 1750,3313 1887,3313 2044,3470 ; 2052.34,3478.34 FTDI.1
RXLED: D3.2 FTDI.23 | length 253.5
  Top Layer w10: FTDI.23 2661.49,3350.39 2698.1,3387
"START LAISSE": "start laisse.1" DSPIC.15 | length 355
  Top Layer w10: DSPIC.15@1878.69,2935 1951,2862.69 1951,2610
SWITCH1: DSPIC.10 switch1.1 | length 4614
  Top Layer w10: DSPIC.10 1751.98,2698.18 1835.53,2614.64 1835.53,2423.16 1798,2385.63 1659.63,2385.63 1160,1886 1160,1263.18 1376.6,1046.57 3426.71,1046.57 3530.61,1150.47 switch1.1@3731.39,1150.47
SWITCH2: DSPIC.11 switch2.1 | length 3646.2
  Top Layer w10: DSPIC.11 1783.48,2694.97 1855.53,2622.92 1855.53,2414.87 1806.28,2365.63 1670.63,2365.63 1180,1875 1180,1271.46 1384.89,1066.57 2526.71,1066.57 2610.61,1150.47 switch2.1@2811.39,1150.47
SWITCH3: DSPIC.14 switch3.1 | length 3082
  Top Layer w10: DSPIC.14 1851.75,2902.2 1883.2,2902.2 1901,2884.41 1901,2335.68 1987.42,2249.26 1987.42,2107.58 1956.33,2076.5 1428.62,2076.5 1200,1847.87 1200,1279.74 1329.27,1150.47 1690.61,1150.47 switch3.1@1891.39,1150.47
TX: DSPIC.25 FTDI.5 spy.1 | length 535.9
  Top Layer w10: DSPIC.25 1720.49,3251.49 1762,3293 1967,3293 2044,3370 ; 2049.98,3375.98 FTDI.5
TXLED: D4.2 FTDI.22 | length 251
  Top Layer w10: FTDI.22 2650.31,3324.8 2693.1,3282
pads on no net: "Hub USB.5" "Hub USB.27" "Hub USB.29" "Hub USB.30" "Hub USB.32" "Régulateur linéaire 3V3." D2.A D2.K DSPIC.2 DSPIC.3 DSPIC.4 DSPIC.12 DSPIC.13 DSPIC.31 DSPIC.32 DSPIC.34 DSPIC.35 DSPIC.36 DSPIC.37 DSPIC.38 FTDI.2 FTDI.3 FTDI.8 FTDI.9 FTDI.10 FTDI.14 FTDI.19 FTDI.24 FTDI.27 FTDI.28 HOLE1.1 HOLE2.1 HOLE3.1 HOLE4.1 ON/OFF.2 P1.6 P4.5 P4.6 P5.5 P5.6 P6.5 P6.6 PTB78560AAH(5V).2 PTB78560AAH(5V).5 PTB78560AAH(5V).11 PTB78560CH(10V).2 PTB78560CH(10V).5 PTB78560CH(10V).11 RPi.5 RPi.6 RPi.MH1 RPi.MH2 S1.4 S1.5 S1.6 S2.1 S2.4 switch1.2 switch2.2 switch3.2

## Silkscreen, mask and mechanical layers (free items; w line width, h text height)
Mechanical 1:
  the board outline again, w10

## Text inside footprints (layer, text, board x,y; h text height)
RPi: Mechanical 1 "PCB Edge" at 343.65,2421.4 h9.84
S1: Bottom Overlay "1" at 1845.28,2356.54 h39.37 r270; Bottom Overlay "0" at 1845.28,1893.94 h39.37 r270